# Altium PCB PCB.PcbDoc
Units mil, origin at the board's own origin, x right, y up, seen from the top; angles counter-clockwise.
Board outline 3543.31 x 3346.46 mil, 2 copper layers (Top Layer, Bottom Layer); 15 components, 87 nets, 190 pads, 4 vias.
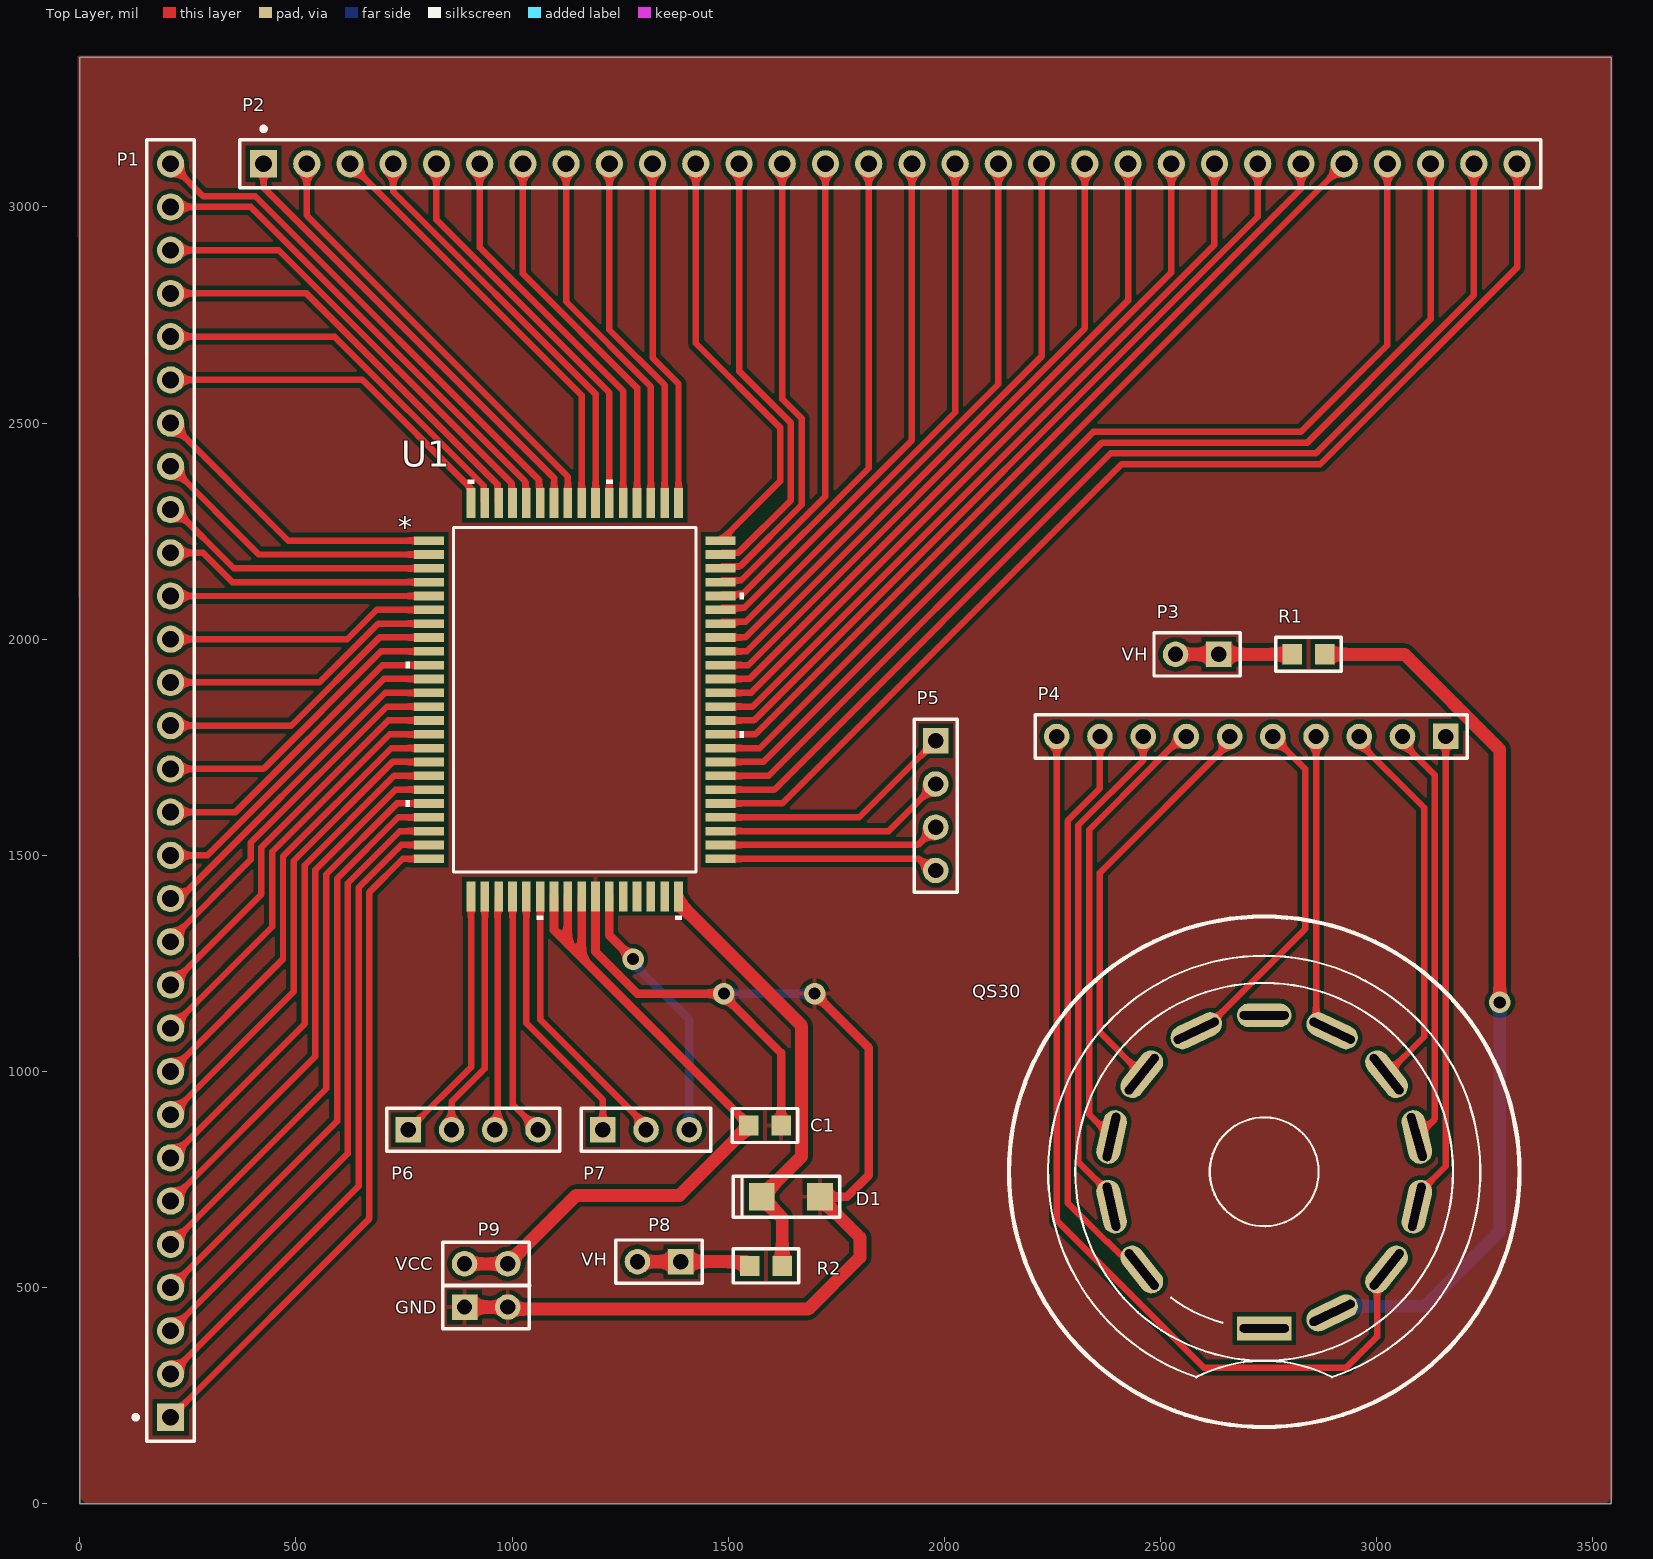
[diagram p0: Top Layer view]
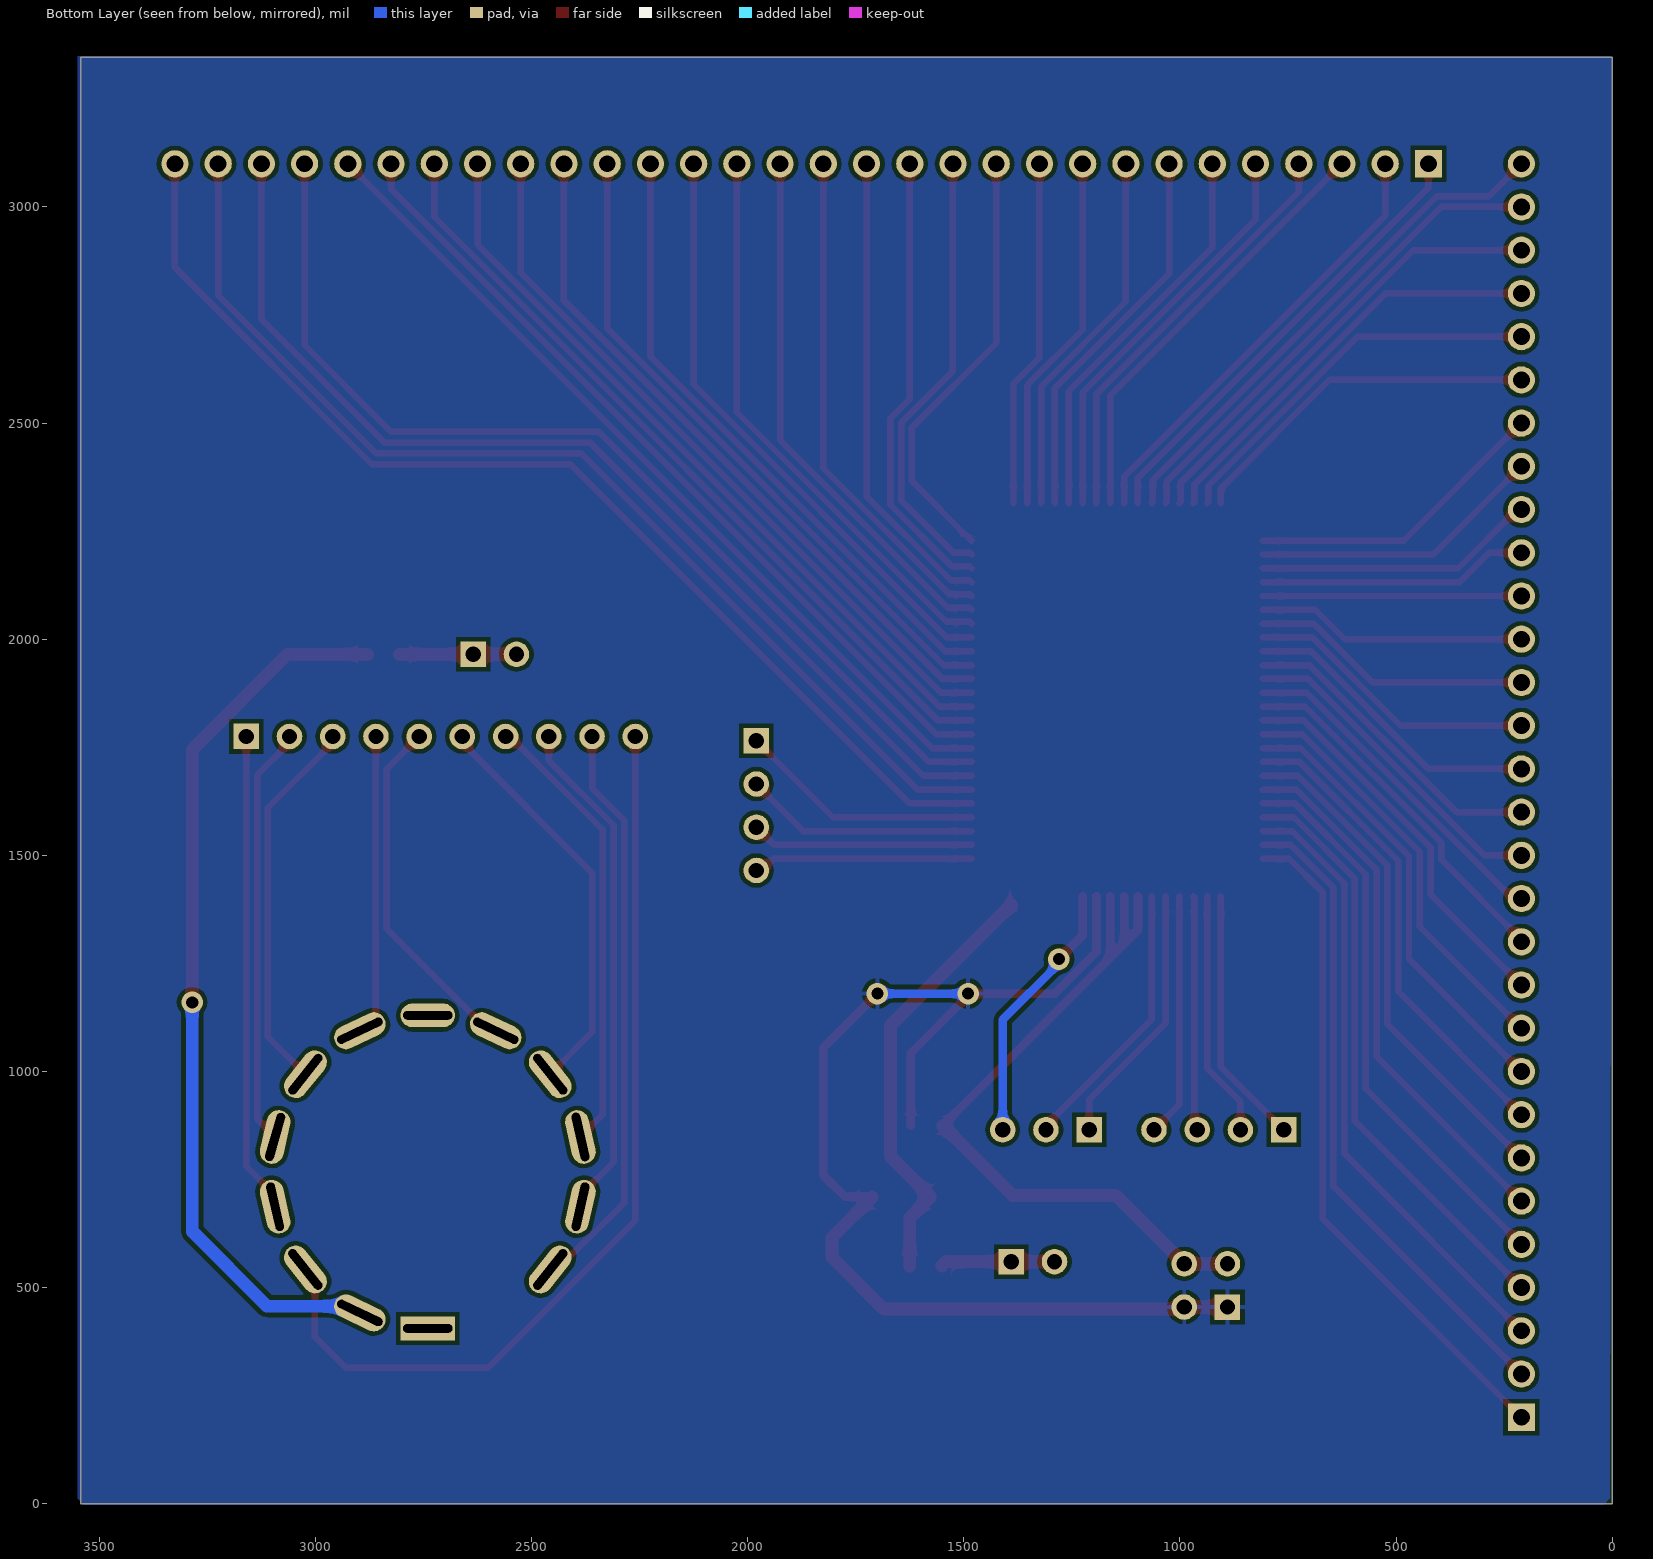
[diagram p1: Bottom Layer view, seen from below]

## Layer stack, top to bottom
Top Solder: solder mask 0.4, Solder Resist, Dk 3.5
Top Layer: signal copper 1.4
Dielectric 1: dielectric 12.6, FR-4, Dk 4.8
Bottom Layer: signal copper 1.4
Bottom Solder: solder mask 0.4, Solder Resist, Dk 3.5

## Board outline
0,0 0,3346.46 3543.31,3346.46 3543.31,0

## Design rules (kind name [scope] priority, off if disabled: settings)
Clearance [All] p1: gap=10 ignorepadtopadclearanceinfootprint=FALSE except(0: Arc-Hole Track-Hole SMDPad-Hole THPad-Hole Via-Hole Fill-Hole Poly-Hole Region-Hole Text-Hole)
PolygonConnect [All] p1: connectstyle=Relief reliefconductorwidth=10 reliefentries=4 polygonreliefangle="90 Angle" airgapwidth=10
RoutingVias [All] p1: holewidth=28 width=50 viastyle="Through Hole" minholewidth=28 minwidth=50 maxholewidth=28 maxwidth=50
SolderMaskExpansion [All] p1: expansion=4
Width [All] p1: maxlimit=50 minlimit=10 preferedwidth=10
30 further rules are at their usual default settings.

## Components (designator, comment, footprint, x,y, rotation, side; value= is the part's Value field where it differs from the comment)
C1 "100pF" 0805 1585,875 r180 top
D1 "75V/0.5W" "1206 Semiconductor" 1645,710 r0 top
P1 "Header 30" HDR1X30 210,200 r90 top
P2 "Header 30" HDR1X30 425,3100 r0 top
P3 "Header 2" HDR1X2 2635,1965 r180 top
P4 "Header 10" HDR1X10 3160,1775 r180 top
P5 "Header 4" HDR1X4 1980,1765 r270 top
P6 "Header 4" HDR1X4 760,865 r0 top
P7 "Header 3" HDR1X3 1210,865 r0 top
P8 "Header 2" HDR1X2 1390,560 r180 top
P9 "Header 2X2" HDR2X2 890,455 r0 top
QS30 "QS30-1" QS30-1 2740,767.8 r0 top locked
R1 "20K" 0805 2842.6,1965 r0 top
R2 "240K" 0805 1587.6,550 r0 top
U1 "HV57708PG-G" PQFP80_20X14MC_MCH 1145,1860 r0 top

## Footprints (in the part's own frame and the unit in brackets; to place one, negate y for a bottom-side part, rotate by r counter-clockwise, add the part's x,y. Pads: shape width x height; smd on the part's side, far side on the other; paste and mask are expansions set on the pad)
0805 [mm]
  rect 1.14x1.2 smd: 1(-0.95,0) 2(0.95,0)
  silkscreen extent -1.92,-1 1.92,1, body extent -1,-0.6 1,0.6, height 0.45
"1206 Semiconductor" [mm]
  rect 1.52x1.6 smd: 1(-1.71,0) 2(1.71,0)
  silkscreen extent -3.38,-1.2 2.87,1.2, body extent -1.6,-0.8 1.6,0.8, height 0.55
HDR1X2 [mm] "Connector; Header; 2 Position"
  rect 1.5x1.5 hole 0.9: 1(0,0)
  round 1.5 hole 0.9: 2(2.54,0)
  silkscreen extent -1.27,-1.27 3.81,1.27
HDR1X3 [mm] "Connector; Header; 3 Position"
  rect 1.5x1.5 hole 0.9: 1(0,0)
  round 1.5 hole 0.9: 2(2.54,0) 3(5.08,0)
  silkscreen extent -1.27,-1.27 6.35,1.27
HDR1X4 [mm] "Connector; Header; 4 Position"
  rect 1.5x1.5 hole 0.9: 1(0,0)
  round 1.5 hole 0.9: 2(2.54,0) 3(5.08,0) 4(7.62,0)
  silkscreen extent -1.27,-1.27 8.89,1.27
HDR1X10 [mm] "Connector; Header; 10 Position"
  rect 1.5x1.5 hole 0.9: 1(0,0)
  round 1.5 hole 0.9: 2(2.54,0) 3(5.08,0) 4(7.62,0) 5(10.16,0) 6(12.7,0) 7(15.24,0) 8(17.78,0) 9(20.32,0) 10(22.86,0)
  silkscreen extent -1.27,-1.27 24.13,1.27
HDR1X30 [mm] "Connector; Header; 30 Position"
  rect 1.6x1.6 hole 0.99: 1(0,0)
  round 1.6 hole 0.99: 2(2.54,0) 3(5.08,0) 4(7.62,0) 5(10.16,0) 6(12.7,0) 7(15.24,0) 8(17.78,0) 9(20.32,0) 10(22.86,0) 11(25.4,0) 12(27.94,0) 13(30.48,0) 14(33.02,0) 15(35.56,0) 16(38.1,0) 17(40.64,0) 18(43.18,0) 19(45.72,0) 20(48.26,0) 21(50.8,0) 22(53.34,0) 23(55.88,0) 24(58.42,0) 25(60.96,0) 26(63.5,0) 27(66.04,0) 28(68.58,0) 29(71.12,0) 30(73.66,0)
  silkscreen extent -1.4,-1.4 75.06,2.17
HDR2X2 [mm] "Connector; Header; 2x2 Position"
  rect 1.5x1.5 hole 0.9: 1(0,0)
  round 1.5 hole 0.9: 2(0,2.54) 3(2.54,0) 4(2.54,2.54)
  silkscreen extent -1.27,-1.27 3.81,3.81
PQFP80_20X14MC_MCH [mil]
  rect 69x20 smd paste+0 mask+0: 1(-337,368) 2(-337,336) 3(-337,304) 4(-337,272) 5(-337,240) 6(-337,208) 7(-337,176) 8(-337,144) 9(-337,112) 10(-337,80) 11(-337,48) 12(-337,16) 13(-337,-16) 14(-337,-48) 15(-337,-80) 16(-337,-112) 17(-337,-144) 18(-337,-176) 19(-337,-208) 20(-337,-240) 21(-337,-272) 22(-337,-304) 23(-337,-336) 24(-337,-368) 41(337,-368) 42(337,-336) 43(337,-304) 44(337,-272) 45(337,-240) 46(337,-208) 47(337,-176) 48(337,-144) 49(337,-112) 50(337,-80) 51(337,-48) 52(337,-16) 53(337,16) 54(337,48) 55(337,80) 56(337,112) 57(337,144) 58(337,176) 59(337,208) 60(337,240) 61(337,272) 62(337,304) 63(337,336) 64(337,368)
  rect 20x69 smd paste+0 mask+0: 25(-240,-455) 26(-208,-455) 27(-176,-455) 28(-144,-455) 29(-112,-455) 30(-80,-455) 31(-48,-455) 32(-16,-455) 33(16,-455) 34(48,-455) 35(80,-455) 36(112,-455) 37(144,-455) 38(176,-455) 39(208,-455) 40(240,-455) 65(240,455) 66(208,455) 67(176,455) 68(144,455) 69(112,455) 70(80,455) 71(48,455) 72(16,455) 73(-16,455) 74(-48,455) 75(-80,455) 76(-112,455) 77(-144,455) 78(-176,455) 79(-208,455) 80(-240,455)
  silkscreen extent -392,-510 392,510, body extent -358,-476 358,476, height 134
QS30-1 [mm]
  rect 3.2x1.4 hole 0.5 slot 2.9 at 0 deg: 1(0,-9.2)
  oval 3.2x1.4 hole 0.5 slot 2.9 at 25.71 deg rot 25.71: 2(3.992,-8.289) 9(-3.992,8.289)
  oval 3.2x1.4 hole 0.5 slot 2.9 at 51.43 deg rot 51.43: 3(7.193,-5.736) 10(-7.193,5.736)
  oval 3.2x1.4 hole 0.5 slot 2.9 at 77.14 deg rot 77.14: 4(8.969,-2.047) 11(-8.969,2.047)
  oval 3.2x1.4 hole 0.5 slot 2.9 at 106.06 deg rot 102.86: 5(8.969,2.047)
  oval 3.2x1.4 hole 0.5 slot 2.9 at 128.57 deg rot 128.57: 6(7.193,5.736) 13(-7.193,-5.736)
  oval 3.2x1.4 hole 0.5 slot 2.9 at 154.29 deg rot 154.29: 7(3.992,8.289)
  oval 3.2x1.4 hole 0.5 slot 2.9 at 0 deg: 8(0,9.2)
  oval 3.2x1.4 hole 0.5 slot 2.9 at 102.86 deg rot 102.86: 12(-8.969,-2.047)
  silkscreen extent -15,-15 15,15

## Part data
C1: library part Capacitor
D1: library part DiodeZener
P1 P2: "Header, 30-Pin", LatestRevisionDate=17-Jul-2002, LatestRevisionNote="Re-released for DXP Platform.", Publisher="Altium Limited"
P3 P8: "Header, 2-Pin", LatestRevisionDate=17-Jul-2002, LatestRevisionNote="Re-released for DXP Platform.", Publisher="Altium Limited"
P4: "Header, 10-Pin", LatestRevisionDate=17-Jul-2002, LatestRevisionNote="Re-released for DXP Platform.", Publisher="Altium Limited"
P5 P6: "Header, 4-Pin", LatestRevisionDate=17-Jul-2002, LatestRevisionNote="Re-released for DXP Platform.", Publisher="Altium Limited"
P7: "Header, 3-Pin", LatestRevisionDate=17-Jul-2002, LatestRevisionNote="Re-released for DXP Platform.", Publisher="Altium Limited"
P9: "Header, 2-Pin, Dual row", LatestRevisionDate=17-Jul-2002, LatestRevisionNote="Re-released for DXP Platform.", Publisher="Altium Limited"
R1 R2: library part Resistor
U1: "No Description Available", Mfr_Name=Microchip, RefDes=RefDes, Type=Type

## Via types
v1: diameter 50, hole 28, Top Layer to Bottom Layer, 4 vias

## Nets (pads, with @x,y where several pads share a name; then routed paths per layer and width w, separated by ;. In a path a pad name is that pad's centre, name@x,y a point inside that pad or via, vN(x,y) a via of type N, cw(c..) or ccw(c..) an arc to the next point about the centre after c; other vN are vias at no path point)
DIN1: P6.1 U1.25 | length 600.1
  Top Layer w15: P6.1 905,1010 U1.25
DIN2: P6.2 U1.26 | length 571.9
  Top Layer w15: P6.2 860,929.64 937,1006.64 U1.26
DIN3: P6.3 U1.27 | length 543.7
  Top Layer w15: P6.3 966.5,871.5 966.5,1402.5 U1.27
DIN4: P6.4 U1.28 | length 564.4
  Top Layer w15: U1.28 1001,924 P6.4
GND: C1.1 D1.2 P9.1 P9.3 U1.34 | length 2785.4
  Top Layer w20: U1.34 1193,1277 1290,1180 v1(1490,1180) 1490,1175 1622.4,1042.6 C1.1 ; v1(1700,1180) 1825,1055 1825,760 1775,710 D1.2
  Top Layer w30: P9.1 P9.3 995,450 1685,450 1805,570 1805,615.75 1712.32,708.43 D1.2
  Bottom Layer w20: v1(1490,1180) v1(1700,1180)
HVCLK: P7.2 U1.30 | length 641.5
  Top Layer w15: U1.30 1065,1120 1310,875 P7.2
HVLE: P7.1 U1.29 | length 613.3
  Top Layer w15: U1.29 1033,1112 1210,935 P7.1
HVOUT1: P1.1 U1.24 | length 1575.4
  Top Layer w15: P1.1 670,660 670,1415 747,1492 U1.24
HVOUT2: P1.2 U1.23 | length 1509.4
  Top Layer w15: P1.2 645,735 645,1425.36 743.64,1524 U1.23
HVOUT3: P1.3 U1.22 | length 1443.4
  Top Layer w15: P1.3 620,810 620,1435.71 740.29,1556 U1.22
HVOUT4: P1.4 U1.21 | length 1377.3
  Top Layer w15: P1.4 595,885 595,1446.07 736.93,1588 U1.21
HVOUT5: P1.5 U1.20 | length 1311.3
  Top Layer w15: P1.5 570,960 570,1456.42 733.58,1620 U1.20
HVOUT6: P1.6 U1.19 | length 1245.3
  Top Layer w15: P1.6 545,1035 545,1466.78 730.22,1652 U1.19
HVOUT7: P1.7 U1.18 | length 1179.2
  Top Layer w15: P1.7 520,1110 520,1477.13 726.87,1684 U1.18
HVOUT8: P1.8 U1.17 | length 1113.2
  Top Layer w15: P1.8 495,1185 495,1487.49 723.51,1716 U1.17
HVOUT9: P1.9 U1.16 | length 1047.2
  Top Layer w15: P1.9 470,1260 470,1497.84 720.16,1748 U1.16
HVOUT10: P1.10 U1.15 | length 981.1
  Top Layer w15: P1.10 445,1335 445,1508.2 716.8,1780 U1.15
HVOUT11: P1.11 U1.14 | length 915.1
  Top Layer w15: P1.11 420,1410 420,1518.55 713.45,1812 U1.14
HVOUT12: P1.12 U1.13 | length 849.1
  Top Layer w15: P1.12 210,1305 395,1490 395,1528.91 710.09,1844 U1.13
HVOUT13: P1.13 U1.12 | length 795.2
  Top Layer w15: P1.13 230.74,1400 706.74,1876 U1.12
HVOUT14: P1.14 U1.11 | length 767
  Top Layer w15: P1.14 295.38,1500 703.38,1908 U1.11
HVOUT15: P1.15 U1.10 | length 738.8
  Top Layer w15: P1.15 360.03,1600 700.03,1940 U1.10
HVOUT16: P1.16 U1.9 | length 710.7
  Top Layer w15: P1.16 424.67,1700 696.67,1972 U1.9
HVOUT17: P1.17 U1.8 | length 682.5
  Top Layer w15: P1.17 489.32,1800 693.32,2004 U1.8
HVOUT18: P1.18 U1.7 | length 654.3
  Top Layer w15: P1.18 553.96,1900 689.96,2036 U1.7
HVOUT19: P1.19 U1.6 | length 626.2
  Top Layer w15: P1.19 618.6,2000 686.6,2068 U1.6
HVOUT20: P1.20 U1.5 | length 598
  Top Layer w15: P1.20 U1.5
HVOUT21: P1.21 U1.4 | length 626.2
  Top Layer w15: P1.21 285,2200 353,2132 U1.4
HVOUT22: P1.22 U1.3 | length 654.3
  Top Layer w15: P1.22 220.36,2300 356.36,2164 U1.3
HVOUT23: P1.23 U1.2 | length 682.5
  Top Layer w15: P1.23 414,2196 U1.2
HVOUT24: P1.24 U1.1 | length 710.7
  Top Layer w15: P1.24 482,2228 U1.1
HVOUT25: P1.25 U1.80 | length 832.9
  Top Layer w15: P1.25 653.89,2600 905,2348.89 U1.80
HVOUT26: P1.26 U1.79 | length 908.3
  Top Layer w15: P1.26 589.25,2700 934.5,2354.75 934.5,2317.5 U1.79
HVOUT27: P1.27 U1.78 | length 983.7
  Top Layer w15: P1.27 524.6,2800 966.5,2358.1 966.5,2317.5 U1.78
HVOUT28: P1.28 U1.77 | length 1059.1
  Top Layer w15: P1.28 459.96,2900 998.5,2361.46 998.5,2317.5 U1.77
HVOUT29: P1.29 U1.76 | length 1134.5
  Top Layer w15: P1.29 395.31,3000 1030.5,2364.81 1030.5,2317.5 U1.76
HVOUT30: P1.30 U1.75 | length 1209.8
  Top Layer w15: P1.30 285,3025 405.67,3025 1062.5,2368.17 1062.5,2317.5 U1.75
HVOUT31: P2.1 U1.74 | length 1063.4
  Top Layer w15: P2.1 425,3045 1097,2373 U1.74
HVOUT32: P2.2 U1.73 | length 1035.2
  Top Layer w15: P2.2 525,2980.36 1129,2376.36 U1.73
HVOUT33: P2.3 U1.72 | length 1007
  Top Layer w15: P2.3 1161,2564 U1.72
HVOUT34: P2.4 U1.71 | length 978.9
  Top Layer w15: P2.4 725,3035.36 1193,2567.36 U1.71
HVOUT35: P2.5 U1.70 | length 950.7
  Top Layer w15: P2.5 825,2970.71 1225,2570.71 U1.70
HVOUT36: P2.6 U1.69 | length 922.5
  Top Layer w15: P2.6 925,2906.07 1257,2574.07 U1.69
HVOUT37: P2.7 U1.68 | length 894.4
  Top Layer w15: P2.7 1025,2845.26 1289,2581.26 U1.68
HVOUT38: P2.8 U1.67 | length 866.2
  Top Layer w15: P2.8 1125,2780.61 1321,2584.61 U1.67
HVOUT39: P2.9 U1.66 | length 838
  Top Layer w15: P2.9 1225,2715.97 1353,2587.97 U1.66
HVOUT40: P2.10 U1.65 | length 809.9
  Top Layer w15: P2.10 1325,2651.32 1385,2591.32 U1.65
HVOUT41: P2.11 U1.64 | length 1010.3
  Top Layer w15: P2.11 1425,2685 1620,2490 1620,2365.33 1482.67,2228 U1.64
HVOUT42: P2.12 U1.63 | length 1043
  Top Layer w15: U1.63 1486.5,2200.5 1523.75,2200.5 1645,2321.75 1645,2500.36 1525,2620.36 P2.12
HVOUT43: P2.13 U1.62 | length 1056.3
  Top Layer w15: U1.62 1486.5,2168.5 1527.1,2168.5 1670,2311.4 1670,2510.71 1625,2555.71 P2.13
HVOUT44: P2.14 U1.61 | length 1094.4
  Top Layer w15: U1.61 1486.5,2136.5 1530.46,2136.5 1725,2331.04 P2.14
HVOUT45: P2.15 U1.60 | length 1169.8
  Top Layer w15: U1.60 1486.5,2104.5 1533.81,2104.5 1825,2395.69 P2.15
HVOUT46: P2.16 U1.59 | length 1245.2
  Top Layer w15: U1.59 1486.5,2072.5 1537.17,2072.5 1925,2460.33 P2.16
HVOUT47: P2.17 U1.58 | length 1320.6
  Top Layer w15: U1.58 1486.5,2040.5 1540.53,2040.5 2025,2524.97 P2.17
HVOUT48: P2.18 U1.57 | length 1396
  Top Layer w15: U1.57 1539.38,2004 2125,2589.62 P2.18
HVOUT49: P2.19 U1.56 | length 1471.3
  Top Layer w15: U1.56 1542.74,1972 2225,2654.26 P2.19
HVOUT50: P2.20 U1.55 | length 1546.7
  Top Layer w15: U1.55 1546.09,1940 2325,2718.91 P2.20
HVOUT51: P2.21 U1.54 | length 1622.1
  Top Layer w15: U1.54 1549.45,1908 2425,2783.55 P2.21
HVOUT52: P2.22 U1.53 | length 1697.5
  Top Layer w15: U1.53 1552.8,1876 2525,2848.2 P2.22
HVOUT53: P2.23 U1.52 | length 1772.9
  Top Layer w15: U1.52 1556.16,1844 2625,2912.84 P2.23
HVOUT54: P2.24 U1.51 | length 1848.3
  Top Layer w15: U1.51 1559.51,1812 2725,2977.49 P2.24
HVOUT55: P2.25 U1.50 | length 1923.7
  Top Layer w15: U1.50 1562.87,1780 2825,3042.13 P2.25
HVOUT56: P2.26 U1.49 | length 2003
  Top Layer w15: U1.49 1573,1748 P2.26
HVOUT57: P2.27 U1.48 | length 2362.3
  Top Layer w15: U1.48 1581,1716 2345,2480 2825,2480 3025,2680 P2.27
HVOUT58: P2.28 U1.47 | length 2440.4
  Top Layer w15: U1.47 1594,1684 2365,2455 2840,2455 3125,2740 P2.28
HVOUT59: P2.29 U1.46 | length 2521.2
  Top Layer w15: U1.46 1607,1652 2385,2430 2859.64,2430 3225,2795.36 P2.29
HVOUT60: P2.30 U1.45 | length 2596.6
  Top Layer w15: U1.45 1625,1620 2410,2405 2870,2405 3325,2860 P2.30
HVOUT61: P5.1 U1.44 | length 571.3
  Top Layer w15: U1.44 1803,1588 P5.1
HVOUT62: P5.2 U1.43 | length 543.1
  Top Layer w15: U1.43 1871,1556 P5.2
HVOUT63: P5.3 U1.42 | length 515
  Top Layer w15: U1.42 1939,1524 P5.3
HVOUT64: P5.4 U1.41 | length 509.2
  Top Layer w15: U1.41 1941.08,1492 1968.08,1465 P5.4
HVPOL: P7.3 U1.35 | length 616.6
  Top Layer w20: U1.35 1225,1315 v1(1280,1260)
  Bottom Layer w20: v1(1280,1260) 1280,1250 1410,1120 P7.3
NetD1_1: D1.1 R2.2 U1.40 | length 1009.2
  Top Layer w30: U1.40@1390,1385.5 1669.84,1105.66 1669.84,803.74 1577.68,711.57 D1.1 1577.68,708.43 1625,661.1 R2.2
NetP3_1: P3.1 P3.2 R1.1 | length 270.2
  Top Layer w30: P3.2 P3.1 R1.1
NetP4_1: P4.1 QS30.4 | length 1115.5
  Top Layer w15: QS30.4 3093.12,713.86 3160,780.73 P4.1
NetP4_2: P4.2 QS30.5 | length 975
  Top Layer w15: P4.2 3060,1760 3135,1685 3135,890.27 QS30.5
NetP4_3: P4.3 QS30.6 | length 879.5
  Top Layer w15: P4.3 2960,1760 3110,1610 3110,1080.44 QS30.6
NetP4_4: P4.4 QS30.7 | length 696.3
  Top Layer w15: P4.4 2860,1131.28 QS30.7
NetP4_5: P4.5 QS30.9 | length 826.1
  Top Layer w15: QS30.9 2599.4,1094.13 2835,1329.73 2835,1700 P4.5
NetP4_6: P4.6 QS30.10 | length 945.7
  Top Layer w15: QS30.10 2360,1090.44 2360,1460 2660,1760 P4.6
NetP4_7: P4.7 QS30.11 | length 1047.2
  Top Layer w15: QS30.11 2335,900.27 2335,1559.29 2485,1709.29 2485,1710 2550,1775 P4.7
NetP4_8: P4.8 QS30.12 | length 1181.8
  Top Layer w15: QS30.12 2386.88,713.86 2310,790.73 2310,1569.64 2460,1719.64 P4.8
NetP4_9: P4.9 QS30.13 | length 1345.4
  Top Layer w15: P4.9 2360,1655 2285,1580 2285,696.54 2375.47,606.07 2377.62,606.07 2406.35,577.34 2421.44,577.34 QS30.13
NetP4_10: P4.10 QS30.3 | length 2196.4
  Top Layer w15: P4.10 2260,655 2600,315 2930,315 3001.09,386.09 3001.09,519.87 QS30.3
NetQS30_2: QS30.2 R1.2 | length 2076.7
  Top Layer w30: R1.2 3064.41,1965 3285,1744.41 v1(3285,1160)
  Bottom Layer w30: QS30.2 2912.53,456.83 3111.83,456.83 3285,630 v1(3285,1160)
VCC: C1.2 P9.2 P9.4 U1.31 U1.32 U1.33 | length 1759.9
  Top Layer w20: U1.31 1097,1326.78 1129,1294.78 ; U1.32 1129,1294.78 ; U1.33 1161,1262.78 ; C1.2 1547.6,876.18 1161,1262.78 ; 1129,1294.78 1161,1262.78
  Top Layer w30: P9.2 P9.4 1148.47,713.47 1387.25,713.47 1547.6,873.82 C1.2
VH: P8.1 P8.2 R2.1 | length 265
  Top Layer w30: P8.2 P8.1 1541.38,560 1550.2,551.18 R2.1
pads on no net: QS30.1 QS30.8 U1.36 U1.37 U1.38 U1.39

## Polygon pours and split planes (outlines as drawn)
GND on Top Layer "Top Layer-GND" (solid, pour order 0): -5,3355 0,3350 3545,3350 3545,15 3530,0 15,0 0,15
GND on Bottom Layer "Bottom Layer-GND" (solid, pour order 2): 0,3345 5,3348.15 3550,3348.15 3550,13.15 3535,-1.85 20,-1.85 5,13.15

## Silkscreen, mask and mechanical layers (free items; w line width, h text height)
Top Overlay:
  lines w10: 840,505 1040,505
  text "VH" at 2410,1950 h30
  text "VH" at 1160,550 h30
  text "VCC" at 730,540 h30
  text "GND" at 730,440 h30
Mechanical 1:
  the board outline again, w10

## Text inside footprints (layer, text, board x,y; h text height)
U1: Top Overlay "*" at 736,2234 h50; Mechanical 13 "*" at 872,2219 h50